# EAGLE board board_rev3 (EAGLE 4.16)
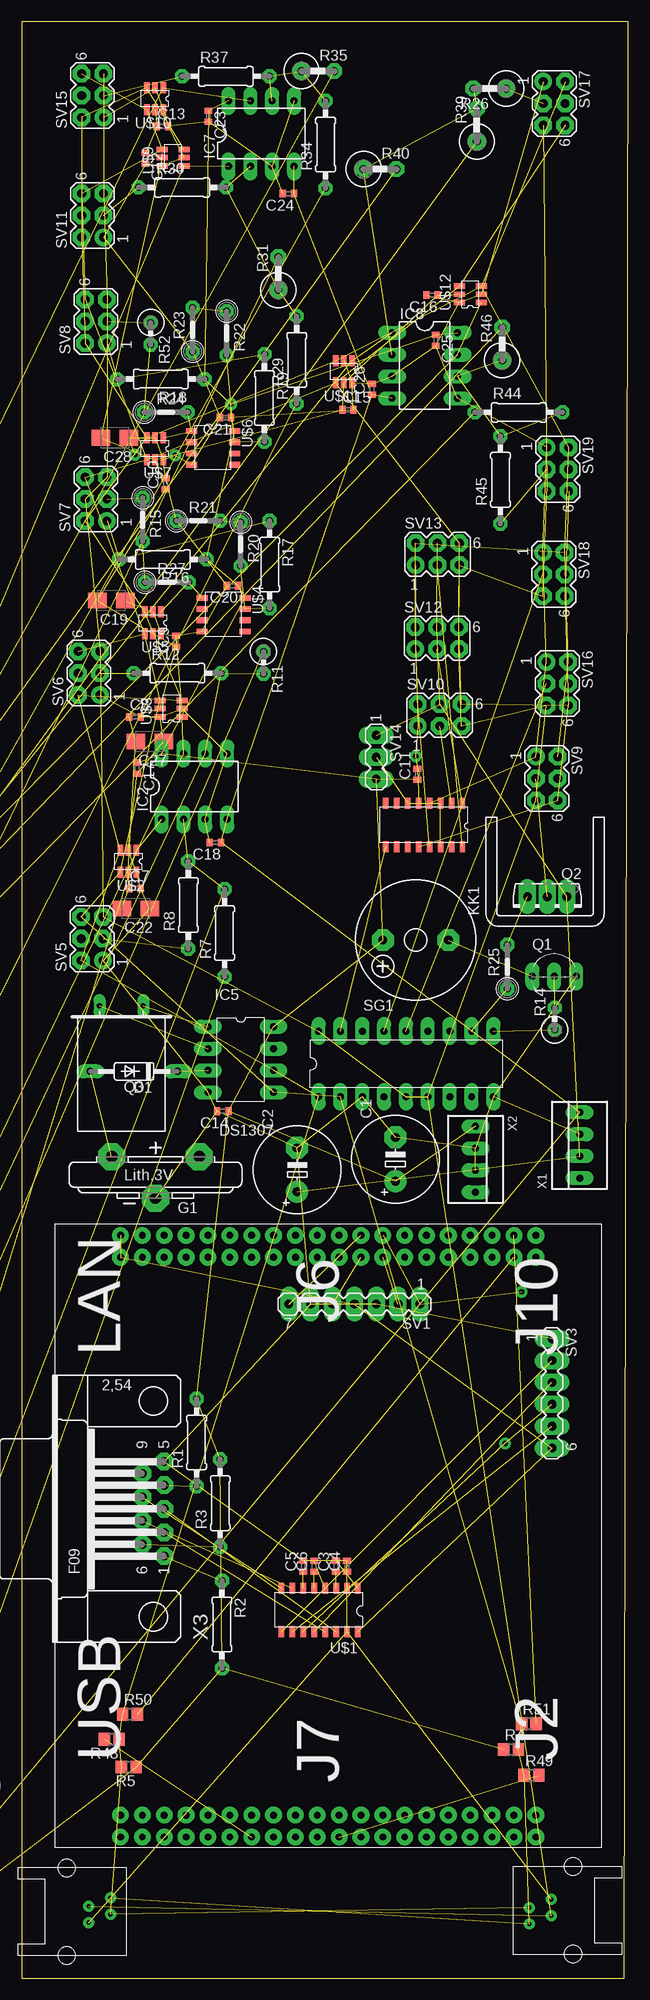
[diagram p0: board, top side]

Size 70.49 x 227.2 mm. Coordinates in mm from the lower left corner, seen from the top.
Outline: 0,0 70.03,0 70.49,227.2 0.05,227.2 0,0
Copper layers (1*16): Top 0.035mm / dielectric 1.5mm / Bottom 0.035mm
Design rules "default": minimum track width 15mil, minimum drill 24mil, track to track 15mil, track to pad 15mil, pad to pad 15mil, via to via 15mil, smd to smd 15mil, copper to edge 40mil, drill to drill 15mil, minimum pad ring 15mil, minimum via ring 15mil, stop-mask expansion 4mil, vias tented up to drill 0mil, thermal gap 10mil
Net classes: 0 default: width 0.61 mm
tRestrict: area 13.1,48 to 17.6,61; area 29.4,40.7 to 39.5,44.7

## Footprints (pad centres in the part's own frame; a part is rotated, then mirrored left to right if it is on the bottom)
E5-10,5 = drill 1.016 pad 2.54 round: + -2.54,0 | drill 1.016 pad 2.54 octagon: - 2.54,0
C0402 = smd 0.7 x 0.9: 1 -0.65,0; 2 0.65,0
B/3528-21W = smd 2.15 x 1.8: + 1.625,0; - -1.625,0
DO35-10 = drill 0.813 long: A 5.08,0; C -5.08,0
CR2032V = drill 1.321 pad 3.15 octagon: + -2.54,-5.08; +@1 -2.54,5.08; - 2.286,0
FOX = drill 0.8 pad 1.93 round: J6.1 67.31,0; J6.2 69.85,0; J6.3 67.31,-2.54; J6.4 69.85,-2.54; J6.5 67.31,-5.08; J6.6 69.85,-5.08; J6.7 67.31,-7.62; J6.8 69.85,-7.62; J6.9 67.31,-10.16; J6.10 69.85,-10.16; J6.11 67.31,-12.7; J6.12 69.85,-12.7; J6.13 67.31,-15.24; J6.14 69.85,-15.24; J6.15 67.31,-17.78; J6.16 69.85,-17.78; J6.17 67.31,-20.32; J6.18 69.85,-20.32; J6.19 67.31,-22.86; J6.20 69.85,-22.86; J6.21 67.31,-25.4; J6.22 69.85,-25.4; J6.23 67.31,-27.94; J6.24 69.85,-27.94; J6.25 67.31,-30.48; J6.26 69.85,-30.48; J6.27 67.31,-33.02; J6.28 69.85,-33.02; J6.29 67.31,-35.56; J6.30 69.85,-35.56; J6.31 67.31,-38.1; J6.32 69.85,-38.1; J6.33 67.31,-40.64; J6.34 69.85,-40.64; J6.35 67.31,-43.18; J6.36 69.85,-43.18; J6.37 67.31,-45.72; J6.38 69.85,-45.72; J6.39 67.31,-48.26; J6.40 69.85,-48.26; J7.1 0,0; J7.2 2.54,0; J7.3 0,-2.54; J7.4 2.54,-2.54; J7.5 0,-5.08; J7.6 2.54,-5.08; J7.7 0,-7.62; J7.8 2.54,-7.62; J7.9 0,-10.16; J7.10 2.54,-10.16; J7.11 0,-12.7; J7.12 2.54,-12.7; J7.13 0,-15.24; J7.14 2.54,-15.24; J7.15 0,-17.78; J7.16 2.54,-17.78; J7.17 0,-20.32; J7.18 2.54,-20.32; J7.19 0,-22.86; J7.20 2.54,-22.86; J7.21 0,-25.4; J7.22 2.54,-25.4; J7.23 0,-27.94; J7.24 2.54,-27.94; J7.25 0,-30.48; J7.26 2.54,-30.48; J7.27 0,-33.02; J7.28 2.54,-33.02; J7.29 0,-35.56; J7.30 2.54,-35.56; J7.31 0,-38.1; J7.32 2.54,-38.1; J7.33 0,-40.64; J7.34 2.54,-40.64; J7.35 0,-43.18; J7.36 2.54,-43.18; J7.37 0,-45.72; J7.38 2.54,-45.72; J7.39 0,-48.26; J7.40 2.54,-48.26
DIL08 = drill 0.813 long: 1 -3.81,-3.81; 2 -1.27,-3.81; 3 1.27,-3.81; 4 3.81,-3.81; 5 3.81,3.81; 6 1.27,3.81; 7 -1.27,3.81; 8 -3.81,3.81
ADT7318SMD = smd 0.635 x 1.27: 1 -10.16,-1.27; 2 -8.89,-1.27; 3 -7.62,-1.27; 4 -6.35,-1.27; 5 -5.08,-1.27; 6 -3.81,-1.27; 7 -2.54,-1.27; 8 -1.27,-1.27; 9 -1.27,3.81; 10 -2.54,3.81; 11 -3.81,3.81; 12 -5.08,3.81; 13 -6.35,3.81; 14 -7.62,3.81; 15 -8.89,3.81; 16 -10.16,3.81
DS1307 = drill 0.8 long: 1 -8.89,-5.08; 2 -6.35,-5.08; 3 -3.81,-5.08; 4 -1.27,-5.08; 5 -1.27,2.54; 6 -3.81,2.54; 7 -6.35,2.54; 8 -8.89,2.54
TO92-EBC = drill 0.813 long: B 0,-1.27; C -2.54,-1.27; E 2.54,-1.27
TO126AV = drill 1.016 long: B 2.286,-1.27; C 0,-1.27; E -2.286,-1.27
Q = drill 0.61 long: 1 -2.54,-7.62; 2 2.54,-7.62
0207/10 = drill 0.813 octagon: 1 -5.08,0; 2 5.08,0
R0805 = smd 1.3 x 1.5: 1 -0.85,0; 2 0.85,0
RTRIM4G/J = smd 1.3 x 1.3: 1 -1.15,-2.75; 3 1.15,-2.75 | smd 2 x 1.3: 2 0,2.75
0309V = drill 0.813 octagon: 1 -1.27,0; 2 1.27,0
0207/5V = drill 0.813 octagon: 1 -2.54,0; 2 2.54,0
0411V = drill 0.914 octagon: 1 -2.54,0; 2 1.27,0
F/CM12P = drill 1.016 pad 2.54 octagon: + 3.81,0; - -3.81,0
MA07-1 = drill 1.016 long: 1 -7.62,0; 2 -5.08,0; 3 -2.54,0; 4 0,0; 5 2.54,0; 6 5.08,0; 7 7.62,0
MA06-1 = drill 1.016 long: 1 -6.35,0; 2 -3.81,0; 3 -1.27,0; 4 1.27,0; 5 3.81,0; 6 6.35,0
MA03-2 = drill 1.016 round: 1 -2.54,-1.27 | drill 1.016 octagon: 2 -2.54,1.27; 3 0,-1.27; 4 0,1.27; 5 2.54,-1.27; 6 2.54,1.27
MA03-1 = drill 1.016 long: 1 -2.54,0; 2 0,0; 3 2.54,0
MAX3232 = smd 0.635 x 1.27: 1 0,-2.54; 2 1.27,-2.54; 3 2.54,-2.54; 4 3.81,-2.54; 5 5.08,-2.54; 6 6.35,-2.54; 7 7.62,-2.54; 8 8.89,-2.54; 9 8.89,2.54; 10 7.62,2.54; 11 6.35,2.54; 12 5.08,2.54; 13 3.81,2.54; 14 2.54,2.54; 15 1.27,2.54; 16 0,2.54
MCP3421 = smd 0.635 x 1.27: 1 -0.953,-1.27; 2 0,-1.27; 3 0.953,-1.27; 4 0.953,1.27; 5 0,1.27; 6 -0.953,1.27
MAX6032 = smd 0.66 x 1.27: P$1 0.3,0.6; P$2 1.6,0.6; P$3 2.9,0.6; P$4 4.2,0.6; P$5 4.2,5.57; P$6 2.9,5.57; P$7 1.6,5.57; P$8 0.3,5.57
MCP23008_DHT = drill 0.8 long: P$1 0,0; P$2 2.54,0; P$3 5.08,0; P$4 7.62,0; P$5 10.16,0; P$6 12.7,0; P$7 15.24,0; P$8 17.78,0; P$9 20.32,0; P$10 20.32,7.62; P$11 17.78,7.62; P$12 15.24,7.62; P$13 12.7,7.62; P$14 10.16,7.62; P$15 7.62,7.62; P$16 5.08,7.62; P$17 2.54,7.62; P$18 0,7.62
J-I2C = drill 0.5 pad 1.27 round: 1 -2.54,-0.635; 2 0,0.318; 3 -2.54,1.27; 4 0,2.223
22-23-2041 = drill 0.813 long: 1 -3.81,0; 2 -1.27,0; 3 1.27,0; 4 3.81,0
F09H = drill 1.016 octagon: 1 -5.486,-1.27; 2 -2.743,-1.27; 3 0,-1.27; 4 2.743,-1.27; 5 5.486,-1.27; 6 -4.115,1.27; 7 -1.372,1.27; 8 1.372,1.27; 9 4.115,1.27 | hole 3.302: -12.522,0; 12.522,0

## Placement (x,y rotation side)
C1  470uF  [E5-10,5]  43.45,95.11 90 top
C2  470uF  [E5-10,5]  32.02,93.89 90 top
C3  100nF  [C0402]  36.55,47.87 90 top
C4  100nF  [C0402]  37.82,47.87 90 top
C5  100nF  [C0402]  32.74,47.87 90 top
C6  100nF  [C0402]  34.01,47.87 90 top
C7  100nF  [C0402]  13.18,126.56 0 top
C8  100nF  [C0402]  13.18,146.47 0 top
C9  100nF  [C0402]  17.95,155.26 90 top
C10  100nF  [C0402]  16.73,173.55 90 top
C11  100nF  [C0402]  45.99,139.81 90 top
C12  100nF  [C0402]  14.4,211.34 270 top
C13  100nF  [C0402]  16.38,215.05 0 top
C14  100nF  [C0402]  23.39,100.7 180 top
C15  100nF  [C0402]  37.92,182.13 0 top
C16  100nF  [C0402]  47.67,195.44 180 top
C17  100nF  [C0402]  13.43,140.53 270 top
C18  100nF  [C0402]  22.52,131.89 180 top
C19  [B/3528-21W]  10.43,159.98 180 top
C20  100nF  [C0402]  24.51,161.71 180 top
C21  100nF  [C0402]  23.69,181.22 180 top
C22  [B/3528-21W]  13.28,124.22 180 top
C23  100nF  [C0402]  21.71,216.22 270 top
C24  100nF  [C0402]  31.01,207.23 180 top
C25  100nF  [C0402]  48.13,190.21 270 top
C26  100nF  [C0402]  40.71,184.52 90 top
C27  [B/3528-21W]  14.9,143.62 180 top
C28  [B/3528-21W]  10.84,178.88 180 top
D1  1N4148  [DO35-10]  13.08,105.32 180 top
G1  CR2032V  [CR2032V]  15.57,92.88 270 top
IC1  FOX  [FOX]  11.5,16.42 90 top
IC2  MAX412CPA  [DIL08]  20.09,138.39 0 top
IC4  ADT7316SMD  [ADT7318SMD]  41.07,135.19 180 top
IC5  DS1307  [DS1307]  26.74,101.61 270 top
IC7  MAX412CPA  [DIL08]  27.86,214.19 0 top
IC8  MAX412CPA  [DIL08]  46.86,187.26 270 top
KK1  D01S  [D01S]  60.83,123.41 0 top
Q1  BC548  [TO92-EBC]  61.89,117.61 0 top
Q2  BD438  [TO126AV]  61.08,124.32 180 top
Q3  32,768Khz  [Q]  11.6,105.32 180 top
R1  2k2  [0207/10]  20.34,62.24 90 top
R2  2k2  [0207/10]  23.29,41.11 270 top
R3  2k2  [0207/10]  23.08,55.18 90 top
R4  [R0805]  56.87,26.58 0 top
R5  [R0805]  12.47,24.55 180 top
R6  [RTRIM4G/J]  -13.9,7.53 0 top  (outside the outline)
R7  [0207/10]  23.59,121.37 90 top
R8  [0207/10]  19.38,124.63 90 top
R9  [RTRIM4G/J]  -24.06,7.53 0 top  (outside the outline)
R10  [RTRIM4G/J]  -34.22,7.53 0 top  (outside the outline)
R11  [0309V]  28.11,152.77 270 top
R12  [0207/10]  18.11,151.55 0 top
R13  [RTRIM4G/J]  -44.38,7.53 0 top  (outside the outline)
R14  [0309V]  61.95,111.42 90 top
R15  [0207/5V]  14.09,169.38 270 top
R16  5k 1%  [0207/10]  16.43,164.76 180 top
R17  100k 1%  [0207/10]  28.82,164.15 270 top
R18  5k 1%  [0207/10]  16.17,185.69 180 top
R19  100k 1%  [0207/10]  28.21,183.5 270 top
R20  [0207/5V]  25.47,166.54 270 top
R21  [0207/5V]  20.54,169.23 0 top
R22  [0207/5V]  23.85,191.02 270 top
R23  [0207/5V]  19.88,191.43 90 top
R24  [0207/5V]  16.78,181.83 0 top
R25  [0207/5V]  56.46,117.46 90 top
R26  10k  [0411V]  53.77,219.42 180 top
R27  [0207/5V]  16.89,162.12 0 top
R28  [RTRIM4G/J]  -54.54,7.53 0 top  (outside the outline)
R29  10k  [0207/10]  31.97,187.92 90 top
R30  10k  [0207/10]  18.66,207.94 0 top
R31  10k  [0411V]  29.84,198.59 90 top
R32  [RTRIM4G/J]  -64.7,7.53 0 top  (outside the outline)
R33  [RTRIM4G/J]  -74.86,7.53 0 top  (outside the outline)
R34  10k  [0207/10]  35.33,212.92 90 top
R35  10k  [0411V]  35.07,221.45 0 top
R36  [RTRIM4G/J]  -85.02,7.53 0 top  (outside the outline)
R37  10k  [0207/10]  23.74,220.84 0 top
R38  [RTRIM4G/J]  -95.18,7.53 0 top  (outside the outline)
R39  10k  [0411V]  52.9,215.81 90 top
R40  10k  [0411V]  42.29,210.07 0 top
R41  [RTRIM4G/J]  -105.34,7.53 0 top  (outside the outline)
R42  [RTRIM4G/J]  -115.5,7.53 0 top  (outside the outline)
R43  [RTRIM4G/J]  -125.66,7.53 0 top  (outside the outline)
R44  10k  [0207/10]  57.78,181.83 0 top
R45  10k  [0207/10]  55.65,174 90 top
R46  10k  [0411V]  55.85,190.41 90 top
R48  [R0805]  10.49,27.75 180 top
R49  [R0805]  59.25,23.58 0 top
R50  [R0805]  12.62,30.7 0 top
R51  [R0805]  58.95,29.58 0 top
R52  [0309V]  15.01,190.97 270 top
SG1  F/CM12P  [F/CM12P]  45.79,120.56 180 top
SV1  [MA07-1]  38.68,78.3 180 top
SV3  [MA06-1]  61.64,67.93 270 top
SV5  [MA03-2]  8.2,120.71 90 top
SV6  [MA03-2]  7.84,151.55 90 top
SV7  [MA03-2]  8.66,171.77 90 top
SV8  [MA03-2]  8.66,192.39 90 top
SV9  [MA03-2]  61.03,139.31 270 top
SV10  [MA03-2]  48.59,146.67 0 top
SV11  [MA03-2]  8.25,204.69 90 top
SV12  [MA03-2]  48.28,155.61 0 top
SV13  [MA03-2]  48.33,165.37 0 top
SV14  [MA03-1]  41.22,141.8 270 top
SV15  [MA03-2]  8.25,218.61 90 top
SV16  [MA03-2]  62.25,150.33 270 top
SV17  [MA03-2]  61.89,217.69 270 top
SV18  [MA03-2]  61.84,163.03 270 top
SV19  [MA03-2]  62.3,175.22 270 top
U$1  MAX3232  [MAX3232]  39.09,42.79 180 top
U$2  MCP3421  [MCP3421]  12.42,129.71 180 top
U$3  MCP3421  [MCP3421]  17.39,147.43 90 top
U$4  MAX6032  [MAX6032]  20.39,160.59 270 top
U$5  MCP3421  [MCP3421]  15.26,157.39 180 top
U$6  MAX6032  [MAX6032]  19.17,179.95 270 top
U$7  MCP3421  [MCP3421]  15.51,177.61 180 top
U$8  MCP23008_DHT  [MCP23008_DHT]  34.51,102.37 0 top
U$9  MCP3421  [MCP3421]  17.6,211.39 90 top
U$10  MCP3421  [MCP3421]  15.51,218.25 180 top
U$11  MCP3421  [MCP3421]  37.46,186.55 180 top
U$12  MCP3421  [MCP3421]  52.14,195.54 90 top
U$13  J-I2C  [J-I2C]  59,8.55 180 top
U$14  J-I2C  [J-I2C]  10.33,7.12 0 top
X1  22-23-2041  [22-23-2041]  64.84,96.74 90 top
X2  22-23-2041  [22-23-2041]  52.75,95.11 270 top
X3  [F09H]  15.31,54.52 90 top

## Library data of the parts
C1-C28 R1-R46 R48-R52 = rcl
D1 = diode
G1 = battery
IC1 IC4 IC5 U$1-U$14 = aggiunte
IC2 IC7 IC8 = maxim
KK1 = heatsink
Q1 = transistor-npn
Q2 = transistor-power
Q3 = special
SG1 = buzzer
SV1 SV3 SV5-SV19 = con-lstb
X1 X2 = con-molex
X3 = con-subd

## Nets
5V: SV5.5 SV6.5 SV7.4 SV7.5 SV8.5 SV9.5 SV10.5 SV11.5 SV12.5 SV13.5 SV15.5 SV16.5 SV17.5 SV18.5 SV19.5 U$8.P$5 U$8.P$6 U$8.P$18 U$13.3 U$14.3
+3V3: IC1.J6.1 IC1.J6.2 SV1.4 SV3.6 U$1.16
+5V: C1.+ C11.1 C14.1 C17.1 C20.1 C21.1 C23.1 C25.1 IC2.8 IC5.8 IC7.8 IC8.8 R1.2 R2.2 R3.2 R4.1 R5.1 R6.3 R10.3 R16.1 R18.1 R28.3 R33.3 R38.3 R42.3 SG1.+ SV14.3 U$4.P$8 U$6.P$8 X2.1
+12V: C2.+ Q2.E SV10.4 SV12.4 SV13.4 SV14.1 X1.2
CH0: IC8.7 R43.2 U$12.1
CH1: IC8.1 R41.2 U$11.1
CH2: IC7.7 R36.2 U$10.1
CH3: IC7.1 R32.2 U$9.1
GND: C1.- C2.- C4.2 C5.2 C7.2 C8.2 C9.2 C10.2 C11.2 C12.2 C13.2 C14.2 C15.2 C16.2 C17.2 C18.2 C19.- C20.2 C21.2 C22.- C23.2 C24.2 C25.2 C26.2 C27.- C28.- G1.- IC2.3 IC2.5 IC4.4 IC4.5 IC5.4 IC7.3 IC7.5 IC8.3 IC8.5 Q1.E R21.1 R23.1 SV1.3 SV1.6 SV3.1 SV5.1 SV6.1 SV9.1 SV10.1 SV11.1 SV12.1 SV13.1 SV15.1 SV16.1 SV17.1 SV18.1 SV19.1 U$1.15 U$2.2 U$2.6 U$3.2 U$3.6 U$4.P$4 U$5.2 U$5.6 U$6.P$4 U$7.2 U$7.6 U$8.P$3 U$8.P$9 U$9.2 U$9.6 U$10.2 U$10.6 U$11.2 U$11.6 U$12.2 U$12.6 U$13.1 U$14.1 X1.3 X2.2 X2.3 X3.5
N$1: R14.1 U$8.P$10
N$2: R17.2 R20.2 U$4.P$7
N$3: R19.2 R22.2 U$6.P$7
N$4: D1.C IC5.3
N$5: R24.1 R52.2
N$6: R15.2 R27.1
N$7: SV8.4
N$8: R20.1 R21.2
N$9: IC2.1 R9.2 U$2.1
N$10: IC2.7 R13.2 U$3.1
N$11: SV18.3 U$8.P$15
N$12: D1.A G1.+
N$13: R27.2 U$4.P$1 U$5.1
N$14: Q2.B R25.2
N$15: IC1.J7.13 R48.2
N$16: R25.1 U$8.P$11
N$17: IC4.16 SV13.3
N$18: SV16.3 U$8.P$14
N$19: Q2.C SV9.3
N$20: Q1.C SG1.-
N$21: IC4.3 IC4.6 IC4.14 SV14.2
N$22: R24.2 U$6.P$1 U$7.1
N$23: IC4.2 SV10.3
N$25: IC4.9 U$8.P$17
N$26: Q1.B R14.2
N$27: C3.2 U$1.1
N$28: R18.2 R19.1 SV8.1
N$29: R16.2 R17.1 SV7.1
N$30: R35.2 R36.3
N$31: R10.2 R11.1
N$33: R40.2 R41.3
N$34: R43.3 R46.2
N$35: R31.2 R32.3
N$36: U$1.14 X3.3
N$37: R15.1 SV7.3
N$38: R52.1 SV8.3
N$39: C6.2 U$1.4
N$40: U$1.13 X3.2
N$41: C5.1 U$1.6
N$42: C3.1 U$1.3
N$43: C4.1 U$1.2
N$44: C6.1 U$1.5
N$45: U$1.8 X3.8
N$46: U$1.7 X3.7
N$47: R2.1 X3.1
N$48: R1.1 X3.4
N$49: R3.1 X3.6
N$50: IC4.1 SV12.3
N$53: IC1.J7.21 R49.2
N$54: IC1.J6.38 R51.2
N$55: SV3.4 U$1.11
N$56: SV3.3 U$1.12
N$57: SV3.5 U$1.10
N$58: IC2.2 R7.2 R8.2 R9.3
N$59: SV3.2 U$1.9
N$60: R8.1 SV5.3
N$61: IC1.J6.37 R50.2
N$62: R6.2 R7.1
N$63: IC2.6 R11.2 R12.2 R13.3
N$66: R22.1 R23.2
N$69: R12.1 SV6.3
N$83: IC5.1 Q3.1
N$84: IC5.2 Q3.2
N$113: IC7.2 R29.2 R30.2 R31.1
N$114: IC7.6 R34.2 R35.1 R37.2
N$115: IC8.2 R26.2 R39.2 R40.1
N$116: IC8.6 R44.2 R45.2 R46.1
N$117: R45.1 SV19.3
N$119: R26.1 SV17.3
N$121: R42.2 R44.1
N$122: R38.2 R39.1
N$123: R33.2 R34.1
N$124: R37.1 SV15.3
N$125: R30.1 SV11.3
N$126: R28.2 R29.1
SCL: IC4.13 IC5.6 R5.2 R48.1 R50.1 SV5.2 SV6.2 SV7.2 SV8.2 SV9.2 SV10.2 SV11.2 SV12.2 SV13.2 SV15.2 SV16.2 SV17.2 SV18.2 SV19.2 U$2.3 U$3.3 U$5.3 U$7.3 U$8.P$1 U$9.3 U$10.3 U$11.3 U$12.3 U$13.2 U$14.2
SD1: IC1.J6.26 SV1.1
SD2: IC1.J6.25 SV1.2
SD5: IC1.J6.23 SV1.5
SD7: IC1.J6.24 SV1.7
SDA: IC4.12 IC5.5 R4.2 R49.1 R51.1 SV5.6 SV6.6 SV7.6 SV8.6 SV9.6 SV10.6 SV11.6 SV12.6 SV13.6 SV15.6 SV16.6 SV17.6 SV18.6 SV19.6 U$2.4 U$3.4 U$5.4 U$7.4 U$8.P$2 U$9.4 U$10.4 U$11.4 U$12.4 U$13.4 U$14.4
V-: C18.1 C24.1 C26.1 IC2.4 IC7.4 IC8.4 R6.1 R10.1 R28.1 R33.1 R38.1 R42.1 X1.4
VCC: C7.1 C8.1 C9.1 C10.1 C12.1 C13.1 C15.1 C16.1 C19.+ C22.+ C27.+ C28.+ U$2.5 U$3.5 U$5.5 U$7.5 U$9.5 U$10.5 U$11.5 U$12.5

## Tracks (layer width: path | path; a pad name or v marks a point on that pad's centre or on a via)
5V  (19 unrouted)
+3V3  (4 unrouted)
+5V  (via drill 0.61)  (30 unrouted)
  other vias: 24.35,182.77
+12V  (6 unrouted)
CH0  (2 unrouted)
CH1  (2 unrouted)
CH2  (2 unrouted)
CH3  (2 unrouted)
GND  (via drill 0.61)  (83 unrouted)
  other vias: 45.79,141.9 13.18,176.9 17.85,176.82
N$1  (1 unrouted)
N$2  (2 unrouted)
N$3  (2 unrouted)
N$4  (1 unrouted)
N$5  (1 unrouted)
N$6  (1 unrouted)
N$8  (1 unrouted)
N$9  (2 unrouted)
N$10  (2 unrouted)
N$11  (1 unrouted)
N$12  (1 unrouted)
N$13  (2 unrouted)
N$14  (1 unrouted)
N$15  (1 unrouted)
N$16  (1 unrouted)
N$17  (1 unrouted)
N$18  (1 unrouted)
N$19  (1 unrouted)
N$20  (1 unrouted)
N$21  (3 unrouted)
N$22  (2 unrouted)
N$23  (1 unrouted)
N$25  (1 unrouted)
N$26  (1 unrouted)
N$27  (1 unrouted)
N$28  (2 unrouted)
N$29  (2 unrouted)
N$30  (1 unrouted)
N$31  (1 unrouted)
N$33  (1 unrouted)
N$34  (1 unrouted)
N$35  (1 unrouted)
N$36  (1 unrouted)
N$37  (1 unrouted)
N$38  (1 unrouted)
N$39  (1 unrouted)
N$40  (1 unrouted)
N$41  (1 unrouted)
N$42  (1 unrouted)
N$43  (1 unrouted)
N$44  (1 unrouted)
N$45  (1 unrouted)
N$46  (1 unrouted)
N$47  (1 unrouted)
N$48  (1 unrouted)
N$49  (1 unrouted)
N$50  (1 unrouted)
N$53  (1 unrouted)
N$54  (1 unrouted)
N$55  (via drill 0.61)  (2 unrouted)
  other vias: 56.18,62.12
N$56  (1 unrouted)
N$57  (1 unrouted)
N$58  (3 unrouted)
N$59  (1 unrouted)
N$60  (1 unrouted)
N$61  (1 unrouted)
N$62  (1 unrouted)
N$63  (3 unrouted)
N$66  (1 unrouted)
N$69  (1 unrouted)
N$83  (1 unrouted)
N$84  (1 unrouted)
N$113  (3 unrouted)
N$114  (3 unrouted)
N$115  (3 unrouted)
N$116  (3 unrouted)
N$117  (1 unrouted)
N$119  (1 unrouted)
N$121  (1 unrouted)
N$122  (1 unrouted)
N$123  (1 unrouted)
N$124  (1 unrouted)
N$125  (1 unrouted)
N$126  (1 unrouted)
SCL  (29 unrouted)
SD1  (via drill 0.61)  (2 unrouted)
  other vias: 58.11,79.74
SD2  (1 unrouted)
SD5  (1 unrouted)
SD7  (1 unrouted)
SDA  (29 unrouted)
V-  (12 unrouted)
VCC  (19 unrouted)